# EAGLE board untitled (EAGLE 6.4)
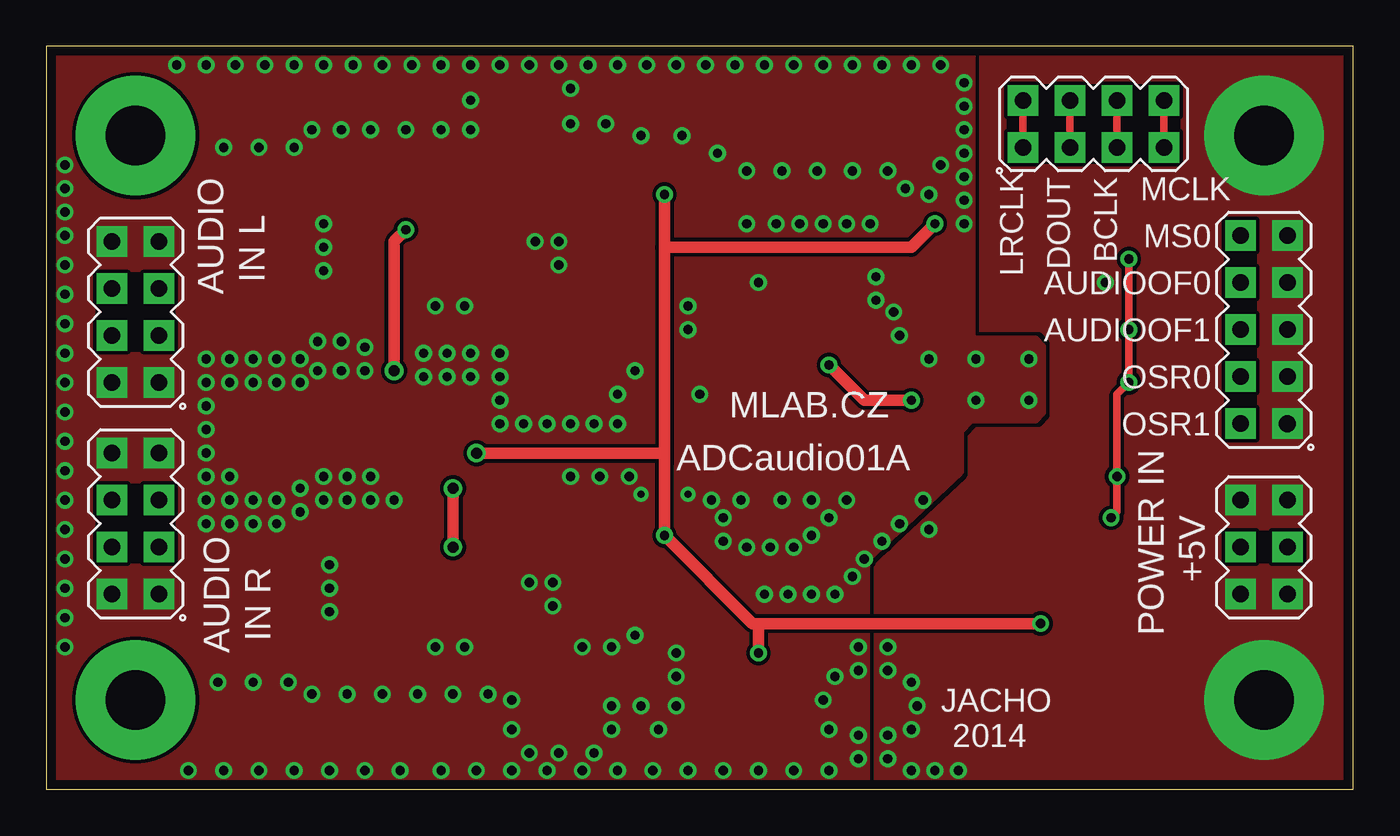
[diagram p0: board, top side]
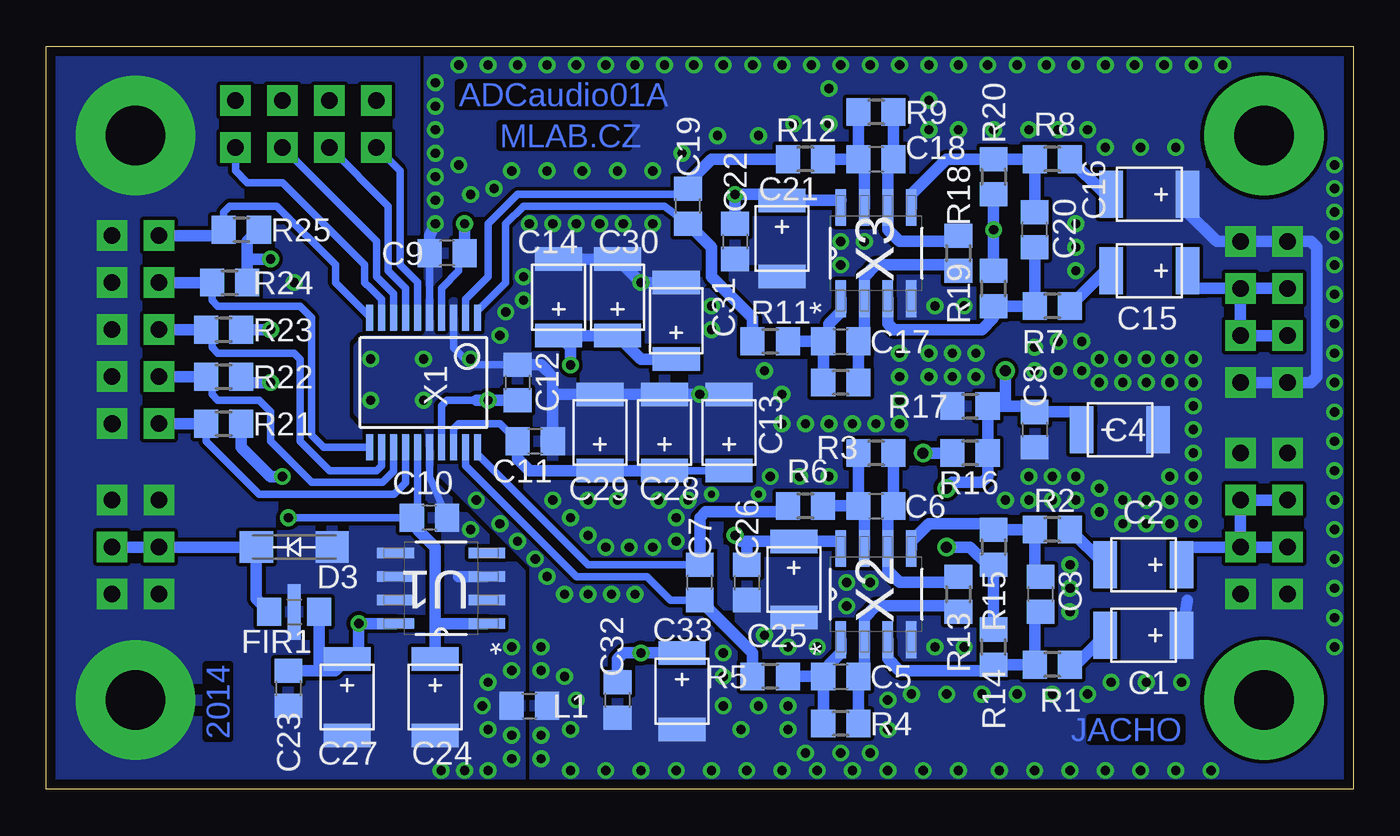
[diagram p1: board, bottom side, seen from below]

Size 70.61 x 40.13 mm. Coordinates in mm from the lower left corner, seen from the top.
Outline: 0,0 70.61,0 70.61,40.13 0,40.13 0,0
Copper layers (1*16): Top 0.035mm / dielectric 1.5mm / Bottom 0.035mm
Design rules "jacho35": minimum track width 8mil, minimum drill 16mil, track to track 8mil, track to pad 8mil, pad to pad 8mil, via to via 8mil, smd to smd 8mil, copper to edge 20mil, drill to drill 8mil, minimum pad ring 10mil, minimum via ring 8mil, stop-mask expansion 4mil, vias tented up to drill 25mil, thermal gap 0mil

## Footprints (pad centres in the part's own frame; a part is rotated, then mirrored left to right if it is on the bottom)
B = smd 1.27 x 2.54: + 2.223,0; - -1.905,0
C0805 = smd 1.3 x 1.5: 1 -0.95,0; 2 0.95,0
SMA = smd 1.8 x 1.7: A -2.05,0; K 2.05,0
F0805 = smd 1.3 x 1.5: 1 -1.35,0; 3 1.35,0 | smd 0.7 x 3: 2 0,0
L0805 = smd 1.3 x 1.5: 1 -0.95,0; 2 0.95,0
0805 = smd 1.3 x 1.5: 1 -0.95,0; 2 0.95,0
MA05-2 = drill 0.914 pad 1.651 square: 1 -5.08,-1.27 | drill 0.889 pad 1.651 square: 2 -5.08,1.27; 3 -2.54,-1.27; 4 -2.54,1.27; 5 0,-1.27; 6 0,1.27; 7 2.54,-1.27; 8 2.54,1.27; 9 5.08,-1.27; 10 5.08,1.27
MA04-2 = drill 0.889 pad 1.651 square: 1 -3.81,-1.27; 2 -3.81,1.27; 3 -1.27,-1.27; 4 -1.27,1.27; 5 1.27,-1.27; 6 1.27,1.27; 7 3.81,-1.27; 8 3.81,1.27
MA03-2 = drill 0.889 pad 1.651 square: 1 -2.54,-1.27; 2 -2.54,1.27; 3 0,-1.27; 4 0,1.27; 5 2.54,-1.27; 6 2.54,1.27
SOIC127P600X175-8N = smd 1.981 x 0.559: 1 -2.464,1.905; 2 -2.464,0.635; 3 -2.464,-0.635; 4 -2.464,-1.905; 5 2.464,-1.905; 6 2.464,-0.635; 7 2.464,0.635; 8 2.464,1.905
SSOP20 = smd 0.38 x 1.4: 1 -2.925,-3.5; 2 -2.275,-3.5; 3 -1.625,-3.5; 4 -0.975,-3.5; 5 -0.325,-3.5; 6 0.325,-3.5; 7 0.975,-3.5; 8 1.625,-3.5; 9 2.275,-3.5; 10 2.925,-3.5; 11 2.925,3.5; 12 2.275,3.5; 13 1.625,3.5; 14 0.975,3.5; 15 0.325,3.5; 16 -0.325,3.5; 17 -0.975,3.5; 18 -1.625,3.5; 19 -2.275,3.5; 20 -2.925,3.5
SO8 = smd 1.981 x 0.559: 1 -2.464,1.905; 2 -2.464,0.635; 3 -2.464,-0.635; 4 -2.464,-1.905; 5 2.464,-1.905; 6 2.464,-0.635; 7 2.464,0.635; 8 2.464,1.905
SROUB3M = drill 3.2 pad 6.452: P$1 0,0

## Placement (x,y rotation side)
C1  10uF  [B]  11.49,8.32 0 bottom
C2  10uF  [B]  11.49,12.13 0 bottom
C3  4n7  [C0805]  16.89,10.54 90 bottom
C4  10uF  [B]  12.44,19.43 180 bottom
C5  180pF  [C0805]  27.68,6.09 0 bottom
C6  180pF  [C0805]  25.78,15.3 0 bottom
C7  4n7  [C0805]  35.3,11.17 90 bottom
C8  100nF  [C0805]  17.21,19.43 270 bottom
C9  4u7  [C0805]  48.96,28.95 180 bottom
C10  4u7  [C0805]  49.91,14.67 180 bottom
C11  100nF  [C0805]  44.19,18.79 180 bottom
C12  100nF  [C0805]  45.15,21.97 270 bottom
C13  10uF  [B]  33.72,19.43 270 bottom
C14  10uF  [B]  42.92,26.73 270 bottom
C15  10uF  [B]  11.17,28 0 bottom
C16  10uF  [B]  11.17,32.13 0 bottom
C17  180pF  [C0805]  27.68,24.19 0 bottom
C18  180pF  [C0805]  25.78,34.03 0 bottom
C19  4n7  [C0805]  35.94,31.49 90 bottom
C20  4n7  [C0805]  17.21,30.22 90 bottom
C21  47uF  [B]  30.86,29.59 90 bottom
C22  100nF  [C0805]  33.4,29.59 270 bottom
C23  100nF  [C0805]  57.53,5.46 270 bottom
C24  10uF  [B]  49.59,4.82 90 bottom
C25  47uF  [B]  30.22,11.17 90 bottom
C26  100nF  [C0805]  32.76,11.17 270 bottom
C27  47uF  [B]  54.35,4.82 90 bottom
C28  10uF  [B]  37.21,19.43 270 bottom
C29  10uF  [B]  40.7,19.43 270 bottom
C30  10uF  [B]  39.75,26.73 270 bottom
C31  10uF  [B]  36.57,25.46 270 bottom
C32  100nF  [C0805]  39.75,4.82 270 bottom
C33  47uF  [B]  36.26,5.14 90 bottom
D3  M4  [SMA]  57.21,13.08 180 bottom
FIR1  [F0805]  57.21,9.59 0 bottom
L1  [L0805]  44.51,4.51 0 bottom
R1  1k  [0805]  16.25,6.73 180 bottom
R2  1k  [0805]  16.25,14.03 180 bottom
R3  1k  [0805]  25.78,18.16 180 bottom
R4  1k  [0805]  27.68,3.55 180 bottom
R5  22R  [0805]  31.49,6.09 180 bottom
R6  22R  [0805]  29.59,15.3 180 bottom
R7  1k  [0805]  16.25,26.1 180 bottom
R8  1k  [0805]  16.25,34.03 180 bottom
R9  1k  [0805]  25.78,36.57 180 bottom
R10  1k  [0805]  27.68,21.97 180 bottom
R11  22R  [0805]  31.49,24.19 180 bottom
R12  22R  [0805]  29.59,34.03 180 bottom
R13  1k  [0805]  21.33,10.54 270 bottom
R14  1k  [0805]  19.43,7.68 90 bottom
R15  1k  [0805]  19.43,13.08 270 bottom
R16  1k  [0805]  20.7,18.16 180 bottom
R17  1k  [0805]  20.7,20.7 0 bottom
R18  1k  [0805]  21.33,28.95 270 bottom
R19  1k  [0805]  19.43,27.05 90 bottom
R20  1k  [0805]  19.43,33.08 270 bottom
R21  22R  [0805]  61.02,19.75 0 bottom
R22  22R  [0805]  61.02,22.29 0 bottom
R23  22R  [0805]  61.02,24.83 0 bottom
R24  22R  [0805]  60.7,27.37 0 bottom
R25  22R  [0805]  60.07,30.22 0 bottom
SV1  [MA05-2]  65.78,24.83 90 top
SV2  [MA04-2]  56.58,35.94 0 top
SV3  [MA04-2]  4.82,14.35 90 top
SV4  [MA03-2]  65.78,13.08 90 top
SV5  [MA04-2]  4.82,25.78 90 top
U1  LE33CD-TR  [SOIC127P600X175-8N]  49.27,10.86 180 bottom
X1  WM8786  [SSOP20]  50.23,21.97 180 bottom
X2  LT6231CS  [SO8]  25.78,10.54 90 bottom
X3  LT6231CS  [SO8]  25.78,28.95 90 bottom
X4  SROUB3M  [SROUB3M]  4.82,4.82 0 top
X5  SROUB3M  [SROUB3M]  4.82,35.3 0 top
X6  SROUB3M  [SROUB3M]  65.78,4.82 0 top
X7  SROUB3M  [SROUB3M]  65.78,35.3 0 top

## Library data of the parts
C1-C33 = moje_C
D3 FIR1 X4-X7 = moje
L1 = moje_L
R1-R25 = moje_R
SV1 = moje_hrebinky
SV2-SV5 = moje_hrebinky; OC_FARNELL: unknown; OC_NEWARK: unknown
U1 = moje_U; MPN: LE33CD-TR; OC_FARNELL: 1652371; OC_NEWARK: 89K1279; PACKAGE: SOIC-8; SUPPLIER: STMICROELECTRONICS
X1 = moje_io
X2 X3 = moje_OZ

## Nets
1: C20.1 R7.2 R19.1 X3.3
4: C3.1 R1.2 R14.1 X2.3
+3.3V: C10.2 C24.+ R21.2 R22.2 R23.2 R24.2 R25.2 U1.1 X1.15
+5V: C9.1 C21.+ C22.1 C23.1 C25.+ C26.1 C27.+ C32.1 C33.+ FIR1.3 R16.2 U1.8 X1.4 X2.8 X3.8
AGND: C1.+ C4.- C8.2 C9.2 C11.1 C12.1 C13.- C14.- C16.+ C21.- C22.2 C25.- C26.2 C28.- C29.- C30.- C31.- C32.2 C33.- L1.2 R17.1 SV3.1 SV3.2 SV3.7 SV3.8 SV5.1 SV5.2 SV5.7 SV5.8 X1.3 X1.5 X2.4 X3.4
AUDIOOF0: R24.1 SV1.8 X1.11
AUDIOOF1: R23.1 SV1.6 X1.12
AVDD/2: C4.+ C8.1 R14.2 R15.2 R16.1 R17.2 R19.2 R20.2
BCLK: SV2.5 SV2.6 X1.8
DGND: C10.1 C23.2 C24.- C27.- D3.A FIR1.2 L1.1 SV1.1 SV1.3 SV1.5 SV1.7 SV1.9 SV4.1 SV4.2 SV4.5 SV4.6 U1.2 U1.3 U1.5 U1.6 U1.7 X1.16 X6.P$1 X7.P$1
DOUT: SV2.3 SV2.4 X1.7
LRCLK: SV2.1 SV2.2 X1.6
MCLK: SV2.7 SV2.8 X1.9
MS0: R25.1 SV1.10 X1.10
N$1: C5.2 R4.1 R13.2 X2.2
N$2: C1.- R1.1
N$4: C6.2 R3.1 R13.1 X2.6
N$5: C2.- R2.1
N$6: C6.1 R3.2 R6.1 X2.7
N$7: C7.1 R5.2 X1.19
N$9: C17.2 R10.1 R18.2 X3.2
N$11: C15.- R7.1
N$12: C18.2 R9.1 R18.1 X3.6
N$13: C16.- R8.1
N$14: C18.1 R9.2 R12.1 X3.7
N$15: C19.1 R11.2 X1.1
N$17: C15.+ SV5.3 SV5.4 SV5.5 SV5.6
N$18: C20.2 R8.2 R20.1 X3.5
N$19: C2.+ SV3.3 SV3.4 SV3.5 SV3.6
N$21: C19.2 R12.2 X1.2
N$25: C12.2 C14.+ C30.+ C31.+ X1.17
N$26: C11.2 C13.+ C28.+ C29.+ X1.18
N$32: C3.2 R2.2 R15.1 X2.5
N$34: C5.1 R4.2 R5.1 X2.1
N$35: C17.1 R10.2 R11.1 X3.1
N$38: C7.2 R6.2 X1.20
N$41: D3.K FIR1.1 SV4.3 SV4.4
OSR0: R22.1 SV1.4 X1.13
OSR1: R21.1 SV1.2 X1.14

## Tracks (layer width: path | path; a pad name or v marks a point on that pad's centre or on a via)
1
  Bottom 0.61: C20.1 17.2,27.69 R7.2 17.84,26.1 R19.1 19.43,25.46 20.06,24.83 24.83,24.83 25.14,25.14 X3.3
4
  Bottom 0.61: C3.1 17.2,9.27 R1.2 R14.1 19.75,6.41 24.51,6.41 25.14,7.05 X2.3
+3.3V  (via drill 0.5)
  Top 0.406: v58.48,28.64 58.48,28.32 v58.48,24.83 v58.48,21.97 57.85,21.33 v57.85,16.89 57.85,14.98 v57.53,14.67
  Bottom 0.406: v57.53,14.67 C10.2 50.55,14.97 X1.15
  Bottom 0.61: C24.+ 49.59,8.95 | U1.1 49.59,8.95 | 50.54,14.35 C10.2 | 49.59,8.95 49.59,12.13 49.59,13.08 50.54,14.03 50.54,14.35 C10.2 | C10.2 | R25.2 59.75,29.59 59.75,28.64 | R24.2 59.75,28.64 | v58.48,28.64 59.75,28.64 | v58.48,24.83 R23.2 | v58.48,21.97 59.75,21.97 R22.2 | v57.85,16.89 58.48,16.89 60.07,18.48 R21.2
+5V  (via drill 0.5, 0.6)
  Top 0.61: v53.72,8.95 48.96,8.95 38.48,8.95 | 38.48,8.95 38.16,8.95 | 38.16,8.95 v33.4,13.71 33.4,17.52 33.4,18.16 | v33.4,32.13 33.4,29.27 | 33.4,29.27 33.4,18.16 | v23.24,18.16 33.4,18.16 | 38.16,8.95 38.48,8.95 | 38.48,8.95 v38.48,7.36 | v48,30.54 46.73,29.27 33.4,29.27
  Bottom 0.254: X2.8 27.68,13.08 28,13.4 | X3.8 27.68,31.81
  Bottom 0.406: X1.4 49.25,27.07 48.32,28 48.32,28.95 C9.1
  Bottom 0.61: C27.+ 53.72,7.36 v53.72,8.95 U1.8 | 32.76,13.4 31.49,13.4 C25.+ 28,13.4 | 32.76,13.4 33.08,13.4 v33.4,13.71 | C26.1 32.76,13.4 | C22.1 v33.4,32.13 31.18,32.13 C21.+ 27.68,31.81 | 53.96,6.81 C27.+ | R16.2 22.92,18.16 v23.24,18.16 | C23.1 55.94,6.41 | 55.94,6.41 54.99,6.41 C27.+ | FIR1.3 55.86,6.49 55.94,6.41 | C32.1 39.75,7.05 39.43,7.36 39.11,7.36 | 39.11,7.36 v38.48,7.36 | v38.48,7.36 C33.+ | v38.48,7.36 39.11,7.36 | 48.01,29.59 C9.1 v48.01,30.54 v48,30.54
AGND  (via drill 0.4, 0.5)
  Bottom 0.254: X1.3 48.6,23.84 47.69,22.92 43.88,22.92 43.56,22.6 43.24,22.29 43.24,21.33 v35.3,21.33
  Bottom 0.406: 49.9,26.72 X1.5 49.9,27.36 49.9,28.31 C9.2 | C12.1 | X1.3 48.6,23.84 47.69,22.92 C12.1
  Bottom 0.61: SV5.1 SV5.2 | C16.+ 8.95,31.18 7.36,29.59 SV5.7 SV5.8 2.28,29.59 1.97,29.27 1.97,22.29 2.28,21.97 SV5.2 | SV5.2 3.24,21.97 | C1.+ 8.95,10.22 | C29.- C28.- v35.3,21.33 | C14.- C30.- v38.48,27.37 C31.- | v35.3,21.33 C13.- v35.3,21.33 | C12.1 | C11.1 43.24,21.33 | 43.24,21.33 43.24,22.29 43.56,22.6 43.88,22.92 C12.1 | v35.3,21.33 43.24,21.33 | C9.2 49.91,29.9 v49.59,30.54
  other vias: 21.02,7.68 22.6,7.68 26.1,11.17 27.37,11.17 27.37,9.9 21.02,26.1 22.6,26.1 26.41,29.59 27.68,29.59 27.68,28.32 10.22,39.11 11.81,39.11 13.4,39.11 14.98,39.11 8.63,39.11 7.05,39.11 1.01,33.72 8.63,23.24 8.63,21.97 8.63,20.7 14.98,30.54 14.98,29.27 14.98,28 20.38,23.56 14.67,24.19 15.94,24.19 17.21,23.87 17.52,15.62 18.79,15.62 15.3,12.13 15.3,10.86 15.3,9.59 16.57,39.11 18.16,39.11 19.75,39.11 21.33,39.11 9.9,23.24 11.17,23.24 12.44,23.24 13.71,23.24 9.9,21.97 11.17,21.97 12.44,21.97 13.71,21.97 14.67,22.6 15.94,22.6 17.21,22.6 21.65,23.56 22.92,23.56 24.51,23.56 20.38,22.29 21.65,22.29 22.92,22.29 24.51,22.29 24.51,21.02 24.51,19.75 25.78,19.75 27.05,19.75 28.32,19.75 29.59,19.75 30.86,19.75 30.86,21.33 8.63,19.43 8.63,18.16 8.63,16.89 8.63,15.62 8.63,14.35 9.9,14.35 11.17,14.35 12.44,14.35 13.71,14.98 14.98,15.62 16.25,15.62 17.52,16.89 16.25,16.89 14.98,16.89 13.71,16.25 12.44,15.62 11.17,15.62 9.9,15.62 9.9,16.89 38.8,10.54 40.07,10.54 41.34,10.54 42.61,10.54 43.56,11.49 43.88,6.41 43.88,7.68 42.61,6.09 41.97,4.82 42.29,3.24 43.88,2.92 43.88,1.65 42.29,1.01 40.38,1.01 33.08,3.24 28.32,16.89 29.91,16.89 31.49,16.89 32.13,15.94 34.67,15.94 35.94,15.62 36.57,14.67 36.57,13.4 37.84,13.08 39.11,13.08 40.38,13.08 41.34,13.71 42.29,14.67 43.24,15.62 41.34,15.62 39.75,15.62 37.53,15.62 37.84,30.54 39.43,30.54 40.7,30.54 41.97,30.54 43.24,30.54 44.51,30.54 44.83,27.68 44.83,26.41 45.78,25.78 46.1,24.51 31.81,22.6 34.67,26.1 34.67,24.83 22.92,39.11 24.51,39.11 26.1,39.11 27.68,39.11 29.27,39.11 49.59,31.81 49.59,33.08 49.59,34.35 49.59,35.62 49.59,36.89 49.59,38.16 48.32,39.11 47.69,23.24 50.23,23.24 53.08,23.24 53.08,21.02 50.23,21.02 46.73,39.11 45.15,39.11 43.56,39.11 41.97,39.11 40.38,39.11 38.8,39.11 37.21,39.11 35.62,39.11 34.03,39.11 32.45,39.11 30.86,39.11 1.01,32.45 1.01,31.18 1.01,29.91 1.01,28.32 1.01,26.73 1.01,25.14 1.01,23.56 1.01,21.97 1.01,20.38 1.01,18.79 1.01,17.21 1.01,15.62 1.01,14.03 1.01,12.44 1.01,10.86 1.01,9.27 1.01,7.68 7.68,1.01 9.59,1.01 11.49,1.01 13.4,1.01 15.3,1.01 17.21,1.01 19.11,1.01 21.33,1.01 23.24,1.01 25.14,1.01 27.05,1.01 28.95,1.01 30.86,1.01 32.76,1.01 34.67,1.01 36.57,1.01 38.48,1.01 9.27,5.78 11.17,5.78 13.08,5.78 14.35,5.14 16.25,5.14 18.16,5.14 20.06,5.14 21.97,5.14 23.87,5.14 25.14,4.82 25.14,3.24 26.1,1.97 27.68,1.97 29.59,1.97 30.54,3.24 30.54,4.51 32.13,4.51 34.03,4.51 34.03,6.09 34.03,7.36 28.95,7.68 30.54,7.68 31.81,8.32 44.19,12.44 45.15,13.4 46.1,14.35 47.37,15.62 9.59,34.67 11.49,34.67 13.4,34.67 14.35,35.62 15.94,35.62 17.52,35.62 19.43,35.62 21.33,35.62 22.92,35.62 22.92,37.21 28.32,37.84 28.32,35.94 30.22,35.94 32.13,35.3 34.35,35.3 36.26,34.35 37.84,33.4 39.75,33.4 41.65,33.4 43.56,33.4 45.46,33.4 46.42,32.45 47.69,32.13 48.32,33.72
  pour Bottom: -0.26,40.38 0.06,40.38 0.06,-0.57 44.19,-0.57 44.19,12.13 49.27,17.21 49.27,19.75 49.59,20.06 53.4,20.06 53.72,20.38 53.72,23.87 53.4,24.19 50.23,24.19 49.91,24.51 49.91,41.65 49.59,41.97 1.33,41.97
  pour Top: 0.06,40.38 0.06,-0.57 43.88,-0.57 44.19,-0.26 44.19,12.44 49.27,17.21 49.27,19.43 49.91,20.06 53.4,20.06 53.72,20.38 53.72,23.87 53.4,24.19 49.91,24.19 49.91,41.65 49.59,41.97 1.97,41.97 0.38,40.38
AUDIOOF0
  Bottom 0.406: X1.11 55.62,18.47 56.26,19.11 56.26,25.46 56.89,26.1 61.34,26.1 61.66,26.41 R24.1
  Bottom 0.61: R24.1 SV1.8
AUDIOOF1
  Bottom 0.406: X1.12 52.5,17.47 52.77,17.21 55.31,17.21 56.89,18.79 56.89,23.24 57.21,23.56 61.34,23.56 61.66,23.87 61.66,24.51 R23.1
  Bottom 0.61: R23.1 SV1.6
AVDD/2  (via drill 0.5, 0.6)
  Top 0.61: v21.97,16.25 v21.97,13.08 | v18.79,22.6 18.79,29.59 v19.43,30.22
  Bottom 0.61: v19.43,30.22 19.43,28.95 R19.2 v19.43,30.22 | v19.43,30.22 R20.2 | v18.79,22.6 18.79,21.65 18.79,20.7 | R14.2 R15.2 19.75,12.13 20.7,13.08 v21.97,13.08 | v21.97,16.25 21.65,16.57 20.06,16.57 19.75,16.89 R16.1 R17.2 18.79,20.7 | C4.+ 14.35,19.75 14.35,20.38 C8.1 17.53,20.7 18.79,20.7
BCLK
  Top 0.406: SV2.6 SV2.5
  Bottom 0.406: X1.8 51.85,26.77 52.77,27.68 52.77,29.59 SV2.5
DGND  (via drill 0.5)
  Bottom 0.406: X1.16 49.9,16.88 C10.1
  Bottom 0.61: U1.3 48.32,11.49
  other vias: 47.69,14.03 57.21,27.37 45.46,7.68 45.46,6.41 46.73,5.78 47.05,4.51 46.73,3.24 45.46,2.92 45.46,1.65 46.73,1.01 48,1.01 49.27,1.01
  pour Top (rank 2): 44.51,-0.26 71.82,-0.26 72.13,0.06 72.13,39.75 70.55,41.34 50.54,41.34 49.91,40.7 49.91,24.51 50.23,24.19 53.4,24.19 53.72,23.87 53.72,20.38 53.4,20.06 49.91,20.06 49.27,19.43 49.27,17.84 43.88,12.44 43.88,0.06 44.19,-0.26
  pour Bottom (rank 2): 72.13,0.38 72.13,39.75 70.55,41.34 50.54,41.34 49.91,40.7 49.91,24.51 50.54,23.87 53.4,23.87 53.72,23.56 53.72,20.7 53.08,20.06 49.59,20.06 48.96,19.43 48.96,17.84 44.19,12.76 43.88,0.06 44.19,-0.26 71.5,-0.26
DOUT
  Top 0.406: SV2.4 SV2.3
  Bottom 0.406: SV2.3 52.13,31.49 52.13,28 51.5,27.37 51.2,27.07 51.2,26.44 X1.7
LRCLK
  Top 0.406: SV2.2 SV2.1
  Bottom 0.406: X1.6 50.55,26.42 50.55,27.37 51.18,28 51.5,28.32 51.5,33.4 SV2.1 52.13,34.03
MCLK
  Top 0.406: SV2.8 SV2.7
  Bottom 0.406: X1.9 52.5,26.47 53.08,27.05 53.4,27.37 53.4,28.32 57.85,32.76 59.75,32.76 60.39,33.4 SV2.7
MS0
  Bottom 0.406: X1.10 53.15,25.53 54.99,27.37 54.99,28.32 58.16,31.49 60.7,31.49 61.02,31.18 61.02,29.91 R25.1
  Bottom 0.61: 61.02,29.91 SV1.10
N$1
  Bottom 0.61: R13.2 21.65,9.9 25.78,9.9 26.41,9.27 X2.2 26.41,6.41 C5.2 R4.1
N$2
  Bottom 0.61: R1.1 14.98,6.73 C1.-
N$4
  Bottom 0.61: R13.1 21.65,11.17 24.51,11.17 25.14,11.81 X2.6 25.14,15.3 C6.2 R3.1
N$5
  Bottom 0.61: C2.- R2.1
N$6
  Bottom 0.61: X2.7 26.41,15.3 C6.1 | C6.1 R6.1 | C6.1 R3.2
N$7
  Bottom 0.406: C7.1 36.89,10.22 38.16,11.49 41.97,11.49 47.95,17.47 X1.19
  Bottom 0.61: R5.2 32.44,7.36 C7.1
N$9
  Bottom 0.61: R18.2 21.65,28.32 25.78,28.32 26.41,27.68 X3.2 26.41,24.83 C17.2 R10.1
N$10
  pour Bottom: 55.31,27.37 52.45,29.59 52.13,29.59
N$11
  Bottom 0.61: C15.- 13.4,28 R7.1
N$12
  Bottom 0.61: R18.1 21.65,29.59 24.51,29.59 25.14,30.22 X3.6 25.14,33.72 C18.2 R9.1
N$13
  Bottom 0.61: C16.- 13.4,32.13 R8.1
N$14
  Bottom 0.61: X3.7 26.41,33.72 C18.1 | C18.1 R9.2 | R12.1 C18.1
N$15
  Bottom 0.406: X1.1 47.3,25.85 45.78,27.37 45.78,30.54 44.83,31.49 37.21,31.49 C19.1
  Bottom 0.61: C19.1 34.67,29.27 34.67,27.68 32.44,25.46 R11.2
N$17
  Bottom 0.61: SV5.6 SV5.5 | SV5.4 SV5.3 6.09,25.78 SV5.5 | SV5.5 8,27.05 8.95,27.05 C15.+
N$18
  Bottom 0.61: C20.2 R8.2 18.15,34.03 R20.1 21.97,34.03 23.87,32.13 X3.5
N$19
  Bottom 0.61: SV3.3 SV3.5 SV3.6 | SV3.4 SV3.3 | SV3.3 8.95,13.08 9.27,12.76 C2.+
N$21
  Bottom 0.406: X1.2 47.95,26.47 46.73,27.68 46.73,30.54 45.15,32.13 36.25,32.13 C19.2
  Bottom 0.61: R12.2 34.67,34.03 35.94,32.76 C19.2
N$25  (via drill 0.5)
  Top 0.61: v46.73,21.02 44.19,21.02 v42.29,22.92
  Bottom 0.406: X1.17 49.25,20.72 48.96,21.02 v46.73,21.02 47.37,21.02
  Bottom 0.61: C12.2 47.37,21.02 v46.73,21.02 | C31.+ 38.48,23.24 C30.+ C14.+ 42.29,23.87 v42.29,22.92
N$26
  Bottom 0.406: X1.18 48.6,19.47 48.32,19.75 46.1,19.75 C11.2 | C13.+ C28.+
  Bottom 0.61: C28.+ C29.+ 44.51,17.21 45.15,17.84 C11.2
N$32
  Bottom 0.61: C3.2 17.2,11.8 R2.2 R15.1 19.75,14.35 22.92,14.35 23.24,14.03 23.87,13.4 X2.5
N$34
  Bottom 0.61: C5.1 R4.2 | X2.1 27.68,7.36 28.32,6.73 28.32,6.41 C5.1 | C5.1 R5.1
N$35
  Bottom 0.61: X3.1 27.68,25.78 28.32,25.14 28.32,24.82 C17.1 | C17.1 R11.1 | R10.2 C17.1
N$38
  Bottom 0.406: X1.20 47.3,18.09 41.34,12.13 C7.2
  Bottom 0.61: C7.2 35.3,14.67 34.99,14.98 31.17,14.98 R6.2
N$41
  Bottom 0.61: SV4.3 SV4.4 D3.K 59.26,10.29 FIR1.1
OSR0
  Bottom 0.406: X1.13 51.85,17.17 52.45,16.57 56.26,16.57 58.48,18.79 58.48,20.38 59.12,21.02 61.34,21.02 61.66,21.33 61.66,21.97 R22.1
  Bottom 0.61: R22.1 SV1.4
OSR1
  Bottom 0.406: X1.14 51.2,16.55 51.81,15.94 59.12,15.94 61.97,18.79 R21.1
  Bottom 0.61: SV1.2 R21.1

## Text on the board
Bottom: ADCaudio01A | MLAB.CZ | 2014 | JACHO
tPlace: LRCLK | DOUT | BCLK | MCLK | MS0 | IN L | AUDIOOF0 | AUDIO | AUDIOOF1 | OSR0 | OSR1 | MLAB.CZ | ADCaudio01A | +5V | POWER IN | AUDIO | IN R | JACHO | 2014